# Altium PCB mach_mo_rong_v2.PcbDoc (part 3 of 3)
Units mm, origin at the board's own origin, x right, y up, seen from the top; angles counter-clockwise.
Board outline 108.98 x 90.43 mm, 2 copper layers (Top Layer, Bottom Layer); 128 components, 101 nets, 811 pads, 96 vias.
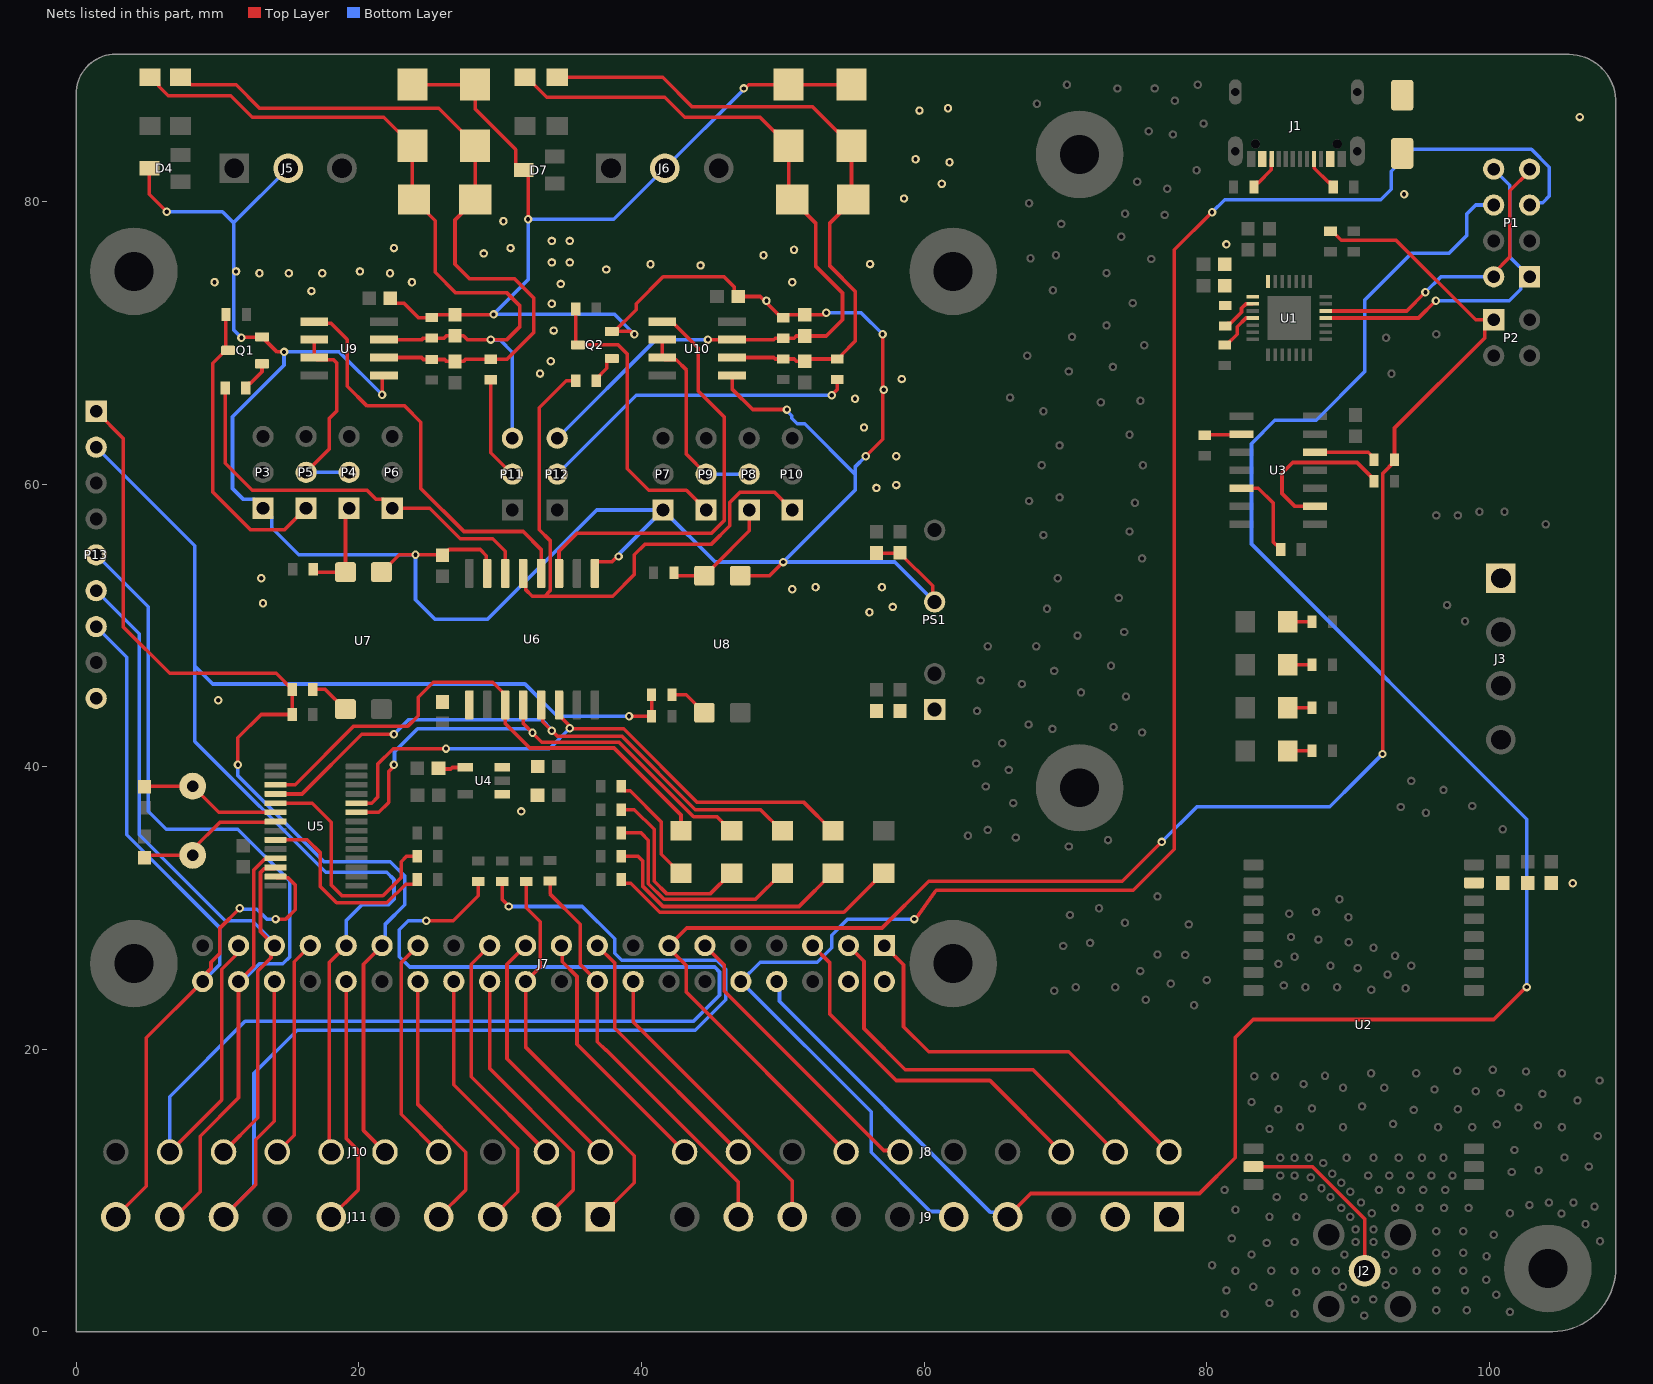
[diagram p2: the nets of this part, all layers, seen from the top]

## Via types
v1: diameter 0.6, hole 0.3, Top Layer to Bottom Layer, tented both sides, 95 vias
v2: diameter 0.6, hole 0.3, Top Layer to Bottom Layer, 1 vias

## Nets (pads, with @x,y where several pads share a name; then routed paths per layer and width w, separated by ;. In a path a pad name is that pad's centre, name@x,y a point inside that pad or via, vN(x,y) a via of type N, cw(c..) or ccw(c..) an arc to the next point about the centre after c; other vN are vias at no path point) (continued)
M_1: J7.13 J8.4 P2.1 R9.2 R12.2 | length 124.1
  Top Layer w0.254: J8.4@54.483,12.722 43.18,24.025 43.18,25.908 41.954,27.134 J7.13@41.954,27.327 43.202,28.575 57.023,28.575 60.325,31.877 74.041,31.877 v1(76.835,34.671) ; R9.2@88.773,77.904 88.898,77.904 89.532,77.27 93.418,77.27 99.06,71.628 P2.1@100.33,71.628 99.707,71.005 99.707,70.37 93.308,63.971 R12.2@93.308,61.722 93.308,61.597 92.464,60.753 92.464,40.902 v1(92.456,40.894)
  Bottom Layer w0.254: v1(76.835,34.671) 79.32,37.156 88.718,37.156 90.692,39.13 v1(92.456,40.894)
MISO: J7.35 J10.3 P13.6 U5.12 | length 54.4
  Top Layer w0.254: J10.3@10.414,12.722 12.827,15.135 12.827,25.527 13.776,26.476 13.776,27.089 J7.35@14.014,27.327 13.031,28.31 13.031,32.504 13.312,32.785 14.019,32.785 U5.12@14.097,32.863
  Bottom Layer w0.254: P13.6@1.397,52.451 4.445,49.403 4.445,35.179 10.541,29.083 12.446,29.083 14.014,27.515 J7.35@14.014,27.327
MOSI: J7.38 J11.9 P13.5 U5.11 | length 70.6
  Top Layer w0.254: J11.9@6.604,8.128 6.985,8.128 8.763,9.906 8.763,13.843 11.474,16.554 J7.38@11.474,24.787 12.562,25.875 12.562,32.685 13.312,33.435 14.019,33.435 U5.11@14.097,33.513
  Bottom Layer w0.254: P13.5@1.397,54.991 5.08,51.308 5.08,36.83 6.35,35.56 11.43,35.56 15.113,31.877 15.113,26.543 14.605,26.035 12.954,26.035 11.706,24.787 J7.38@11.474,24.787
NetAUX1_2: AUX1.2 R8.1 | length 1.7
  Top Layer w0.254: AUX1.2@85.745,41.117 R8.1@87.457,41.117
NetC12_2: C12.2 U4.4 | length 2
  Top Layer w0.254: C12.2@25.63,39.878 25.677,39.831 26.496,39.831 26.604,39.939 U4.4@27.529,39.939
NetC22_2: C22.2 D2.1 D3.1 F1.1 R35.1 R36.2 U9.6 | length 52.5
  Top Layer w0.254: F1.1@7.366,88.794 7.864,88.296 8.107,88.296 8.138,88.265 11.303,88.265 12.954,86.614 25.644,86.614 28.229,84.029 D2.1@28.229,83.949 28.229,80.143 D3.1@28.235,80.137 26.797,78.699 26.797,75.565 27.813,74.549 30.988,74.549 32.385,73.152 32.385,70.739 30.48,68.834 R35.1@29.337,68.834 27.545,68.834 27.394,68.683 C22.2@26.797,68.683 26.2,68.683 26.064,68.819 R36.2@25.146,68.819 24.569,68.819 24.427,68.961 U9.6@21.774,68.961
NetC24_1: C24.1 D3.2 D5.1 F2.1 P11.3 R38.1 U9.7 | length 56.9
  Top Layer w0.254: F2.1@5.207,88.794 5.332,88.794 5.83,88.296 5.83,88.171 6.502,87.499 10.926,87.499 12.446,85.979 21.754,85.979 D5.1@23.784,83.949 23.784,80.258 D3.2@23.905,80.137 25.4,78.642 25.4,74.986 26.853,73.533 30.48,73.533 31.369,72.644 31.369,71.12 30.48,70.231 v1(29.337,70.231) 27.66,70.231 27.394,70.497 C24.1@26.797,70.497 26.2,70.497 26.04,70.337 R38.1@25.146,70.337 24.569,70.337 24.463,70.231 U9.7@21.774,70.231
  Bottom Layer w0.254: v1(29.337,70.231) 29.383,70.185 30.018,70.185 30.861,69.342 P11.3@30.861,63.246
NetC26_2: C26.2 D6.1 D8.1 F3.1 R40.1 R41.2 U10.6 | length 47.7
  Top Layer w0.254: F3.1@34.036,88.794 41.508,88.794 43.603,86.699 52.114,86.699 53.851,84.962 53.931,84.962 54.864,84.029 D6.1@54.864,83.949 54.864,80.27 D8.1@54.997,80.137 53.34,78.48 53.34,75.438 55.118,73.66 55.118,70.104 54.171,69.157 54.171,69.053 53.973,68.855 R40.1@53.848,68.855 51.722,68.855 C26.2@51.562,68.695 50.965,68.695 50.805,68.855 R41.2@50.038,68.855 49.461,68.855 49.355,68.961 U10.6@46.412,68.961
NetC27_1: C27.1 D8.2 D9.1 F4.1 P12.3 R42.1 U10.7 | length 58.3
  Top Layer w0.254: F4.1@31.75,88.794 31.875,88.794 33.293,87.376 41.656,87.376 43.053,85.979 48.389,85.979 48.568,85.8 49.406,84.962 49.486,84.962 50.419,84.029 50.419,80.385 D8.2@50.667,80.137 52.324,78.48 52.324,75.438 54.229,73.533 54.229,71.628 53.086,70.485 C27.1@51.562,70.485 50.965,70.485 50.805,70.325 R42.1@50.038,70.325 49.461,70.325 49.367,70.231 U10.7@46.412,70.231 v1(44.704,70.231)
  Bottom Layer w0.254: P12.3@34.036,63.246 41.021,70.231 v1(44.704,70.231)
NetD1_A: D1.A J1.A4_B9 J1.B4_A9
NetJ1_A5: J1.A5 R1.2 | length 2.6
  Top Layer w0.254: J1.A5@87.61,83.007 87.633,82.984 87.633,82.367 88.651,81.349 88.776,81.349 88.974,81.151 R1.2@88.974,81.026
NetJ1_B5: J1.B5 R2.2 | length 2.6
  Top Layer w0.254: R2.2@83.365,81.026 83.365,81.151 83.563,81.349 83.688,81.349 84.587,82.248 84.587,82.984 J1.B5@84.61,83.007
NetJ2_1: J2.1 U2.12 | length 13.1
  Top Layer w0.254: U2.12@83.313,11.684 87.503,11.684 91.186,8.001 J2.1@91.186,4.318
NetJ7_1: J7.1 J8.10 | length 28.8
  Top Layer w0.254: J7.1@57.194,27.327 58.547,25.974 58.547,21.59 60.325,19.812 70.253,19.812 J8.10@77.343,12.722
NetJ7_3: J7.3 J8.9 | length 27.7
  Top Layer w0.254: J7.3@54.654,27.327 55.753,26.228 55.753,21.463 58.674,18.542 67.713,18.542 J8.9@73.533,12.722
NetJ7_5: J7.5 J8.8 | length 25.8
  Top Layer w0.254: J7.5@52.114,27.327 53.34,26.101 53.34,22.479 58.039,17.78 64.665,17.78 J8.8@69.723,12.722
NetJ7_11: J7.11 J8.5 | length 20.9
  Top Layer w0.254: J7.11@44.494,27.327 45.847,25.974 45.847,24.13 57.15,12.827 58.188,12.827 J8.5@58.293,12.722
NetJ7_16: J7.16 J9.8 | length 21.3
  Top Layer w0.254: J7.16@39.414,24.787 39.414,21.927 50.673,10.668 J9.8@50.673,8.128
NetJ7_17: J7.17 J8.2 | length 18.7
  Top Layer w0.254: J7.17@36.874,27.327 38.1,26.101 38.1,21.485 38.249,21.336 J8.2@46.863,12.722
NetJ7_19: J7.19 J8.1 | length 18.2
  Top Layer w0.254: J7.19@34.334,27.327 34.383,27.278 34.383,26.196 35.433,25.146 35.433,20.342 35.802,19.973 J8.1@43.053,12.722
NetJ7_21: J7.21 J10.10 | length 17.9
  Top Layer w0.254: J7.21@31.794,27.327 30.48,26.013 30.48,19.326 J10.10@37.084,12.722
NetJ7_23: J7.23 J10.9 | length 17.4
  Top Layer w0.254: J7.23@29.254,27.327 27.94,26.013 27.94,18.056 J10.9@33.274,12.722
NetJ7_24: J7.24 J11.2 | length 19.9
  Top Layer w0.254: J7.24@29.254,24.787 29.254,18.625 35.179,12.7 35.179,10.033 J11.2@33.274,8.128
NetJ7_26: J7.26 J11.3 | length 19.3
  Top Layer w0.254: J7.26@26.714,24.787 26.714,17.482 31.242,12.954 31.242,9.906 J11.3@29.464,8.128
NetJ7_27: J7.27 J10.7 | length 16.2
  Top Layer w0.254: J7.27@24.174,27.327 22.987,26.14 22.987,15.389 J10.7@25.654,12.722
NetJ7_28: J7.28 J11.4 | length 18.9
  Top Layer w0.254: J7.28@24.174,24.787 24.174,16.085 27.559,12.7 27.559,10.033 J11.4@25.654,8.128
NetJ7_32: J7.32 J11.6 | length 17.8
  Top Layer w0.254: J11.6@18.034,8.128 19.939,10.033 19.939,12.827 19.094,13.672 J7.32@19.094,24.787
NetJ7_33: J7.33 J10.4 | length 15.6
  Top Layer w0.254: J10.4@14.224,12.722 15.418,13.916 15.418,26.191 J7.33@16.554,27.327
NetL_PWR1_2: L_PWR1.2 R5.1 | length 1.7
  Top Layer w0.254: L_PWR1.2@85.745,50.261 R5.1@87.457,50.261
NetL_RXD1_2: L_RXD1.2 R7.1 | length 1.7
  Top Layer w0.254: L_RXD1.2@85.745,47.213 R7.1@87.457,47.213
NetL_TXD1_2: L_TXD1.2 R6.1 | length 1.7
  Top Layer w0.254: L_TXD1.2@85.745,44.165 R6.1@87.457,44.165
NetP11_2: P11.2 R35.2 | length 7.3
  Top Layer w0.254: R35.2@29.337,67.384 29.337,62.23 P11.2@30.861,60.706
NetP12_2: P12.2 R40.2 | length 23
  Top Layer w0.254: v1(53.467,66.294) 53.467,66.318 53.848,66.699 R40.2@53.848,67.405
  Bottom Layer w0.254: P12.2@34.036,60.706 39.624,66.294 v1(53.467,66.294)
NetQ1_1: Q1.1 R34.2 | length 2.3
  Top Layer w0.254: R34.2@11.991,66.802 11.991,66.927 12.189,67.125 12.314,67.125 13.138,67.949 Q1.1@13.138,68.519
NetQ2_1: Q2.1 R39.2 | length 2.1
  Top Layer w0.254: R39.2@36.793,67.31 36.793,67.435 37.552,68.194 37.552,68.702 37.75,68.9 Q2.1@37.903,68.9
NetR3_2: R3.2 U1.9 | length 2.8
  Top Layer w0.254: R3.2@81.315,71.194 81.513,71.392 81.695,71.392 82.473,72.17 82.473,72.44 82.788,72.755 U1.9@83.262,72.755
NetR4_1: R4.1 U1.11 | length 3.1
  Top Layer w0.254: R4.1@81.28,69.85 81.405,69.85 82.169,70.614 82.169,71.136 82.788,71.755 U1.11@83.262,71.755
NetR11_2: R11.2 U3.2 | length 2.6
  Top Layer w0.254: R11.2@79.875,63.471 R11.2@79.883,63.463 79.912,63.492 82.457,63.492 U3.2@82.486,63.522 U3.2@82.479,63.529
NetR12_1: R12.1 U3.12 | length 4.5
  Top Layer w0.254: U3.12@87.694,62.252 91.453,62.252 91.858,61.847 R12.1@91.858,61.722
NetR13_2: R13.2 U3.5 | length 6.3
  Top Layer w0.254: U3.5@82.486,59.712 83.671,59.712 84.709,58.674 84.709,55.917 84.931,55.695 85.056,55.695 85.254,55.497 R13.2@85.254,55.372
NetR14_1: R14.1 U3.9 | length 11.6
  Top Layer w0.254: U3.9@87.694,58.442 86.233,58.442 86.223,58.452 85.344,59.331 85.344,60.764 86.11,61.53 90.651,61.53 91.858,60.323 R14.1@91.858,60.198
NetR17_1: R17.1 RS_PWR1.2 | length 20.7
  Top Layer w0.254: R17.1@38.571,32.004 38.571,31.948 38.769,31.75 39.243,31.75 41.302,29.691 54.331,29.691 57.1,32.46 RS_PWR1.2@57.15,32.46
NetR18_1: R18.1 RS_TXD1.2 | length 8.2
  Top Layer w0.254: R18.1@38.571,38.608 38.571,38.483 38.769,38.285 39.203,38.285 41.402,36.086 41.402,33.807 42.749,32.46 RS_TXD1.2@42.799,32.46
NetR19_1: R19.1 RS_RXD1.2 | length 15.9
  Top Layer w0.254: R19.1@38.571,35.306 39.978,35.306 40.486,34.798 40.486,31.719 41.598,30.607 48.071,30.607 49.925,32.46 RS_RXD1.2@49.974,32.46
NetR20_1: R20.1 RS_TXD2.2 | length 13
  Top Layer w0.254: R20.1@38.571,36.957 39.497,36.957 40.894,35.56 40.894,31.888 41.767,31.015 44.892,31.015 46.337,32.46 RS_TXD2.2@46.387,32.46
NetR21_1: R21.1 RS_RXD2.2 | length 18.5
  Top Layer w0.254: R21.1@38.571,33.655 39.751,33.655 40.078,33.328 40.078,31.55 41.529,30.099 51.151,30.099 53.512,32.46 RS_RXD2.2@53.562,32.46
NetR26_1: R26.1 U7.1 | length 2.9
  Top Layer w0.254: R26.1@16.727,45.466 17.621,45.466 19.02,44.067 U7.1@19.05,44.067
NetR27_1: R27.1 U8.1 | length 2.8
  Top Layer w0.254: R27.1@42.164,45.085 43.178,45.085 43.872,44.391 43.872,44.387 44.447,43.813 U8.1@44.45,43.813
NetR28_2: R28.2 U5.9 | length 14
  Top Layer w0.254: U5.9@14.097,34.813 16.346,34.813 17.272,33.887 17.272,31.496 18.415,30.353 21.971,30.353 23.302,31.684 23.932,31.684 24.13,31.882 R28.2@24.13,32.004
NetR30_2: R30.2 U5.5 | length 17.2
  Top Layer w0.254: U5.5@14.097,37.413 16.689,37.413 18.034,36.068 18.034,31.623 18.796,30.861 21.697,30.861 22.987,32.151 22.987,33.274 23.368,33.655 R30.2@24.13,33.655
P24: J7.18 J9.9 R15.2 | length 29.3
  Top Layer w0.254: R15.2@33.528,31.914 33.528,30.988 35.665,28.851 35.665,25.996 J7.18@36.874,24.787 36.874,20.53 37.465,19.939 37.509,19.939 46.863,10.585 J9.9@46.863,8.128
P25: J7.22 J11.1 R16.2 | length 28.8
  Top Layer w0.254: R16.2@31.835,31.877 31.835,30.014 32.825,29.024 32.825,25.818 J7.22@31.794,24.787 31.794,20.149 39.497,12.446 39.497,10.541 J11.1@37.084,8.128
P26: J7.37 J10.2 R22.2 | length 96.7
  Top Layer w0.254: J10.2@6.604,12.722 10.287,16.405 10.287,25.654 11.236,26.603 11.236,27.089 J7.37@11.474,27.327 ; v1(24.765,29.083) 26.67,29.083 28.448,30.861 R22.2@28.448,31.877
  Bottom Layer w0.254: J10.2@6.604,12.722 6.604,16.637 11.938,21.971 43.688,21.971 45.525,23.808 45.525,25.468 45.175,25.818 23.585,25.818 22.86,26.543 22.86,28.448 23.495,29.083 v1(24.765,29.083)
P27: J7.36 J11.8 R23.2 | length 86.7
  Top Layer w0.254: J11.8@10.414,8.128 12.7,10.414 12.7,13.589 14.014,14.903 J7.36@14.014,24.787 ; R23.2@30.141,31.877 30.141,30.596 30.607,30.131 v1(30.607,30.099)
  Bottom Layer w0.254: J11.8@10.414,8.128 12.573,10.287 12.573,18.288 15.621,21.336 43.815,21.336 45.974,23.495 45.974,25.654 45.339,26.289 38.608,26.289 38.1,26.797 38.1,27.813 35.814,30.099 v1(30.607,30.099)
P_RX: J7.10 J9.5 P1.5 | length 135.8
  Top Layer w0.254: v1(59.309,29.21) 59.388,29.224 59.445,29.281 59.46,29.296 60.77,31.152 60.859,31.242 74.808,31.242 77.724,34.158 77.724,76.581 v1(80.391,79.248)
  Bottom Layer w0.254: v1(59.309,29.21) 54.61,29.21 53.467,28.067 53.467,27.178 52.451,26.162 48.409,26.162 J7.10@47.034,24.787 56.261,15.56 56.261,12.7 60.452,8.509 61.031,8.509 61.059,8.481 61.75,8.481 J9.5@62.103,8.128 ; v1(80.391,79.248) 81.28,80.137 92.329,80.137 93.064,80.872 93.064,82.142 94.615,83.693 102.997,83.693 104.267,82.423 104.267,80.391 103.797,79.921 103.035,79.921 P1.5@102.87,79.756
P_TX: J7.8 J9.4 P1.6 | length 146.7
  Top Layer w0.254: J9.4@65.913,8.128 67.564,9.779 79.502,9.779 82.042,12.319 82.042,20.828 83.312,22.098 100.33,22.098 v1@102.489,24.257
  Bottom Layer w0.254: J7.8@49.574,24.787 49.769,24.592 49.769,23.383 64.711,8.442 65.599,8.442 J9.4@65.913,8.128 ; P1.6@100.33,79.756 99.06,79.756 98.425,79.121 98.425,77.597 97.155,76.327 94.488,76.327 91.186,73.025 91.186,67.945 87.757,64.516 84.836,64.516 83.185,62.865 83.185,55.753 102.664,36.274 v1(102.664,24.396)
RPI_5V: C1.2 C2.2 C3.2 C6.1 C7.1 C9.2 C10.2 C13.2 C14.2 C15.1 D1.C J3.1 J7.2 J7.4 J9.1 J9.2 P13.9 PS1.1 R3.1 U1.7 U1.8 U2.25 U4.1 U4.3 U6.1 | length 0.3
  Top Layer w0.254: v1@105.769,31.598 105.918,31.747 v1(105.918,31.75) v1@105.918,31.877
  other v1: 31.496,36.83 10.033,44.704 81.407,76.962 93.98,80.518 106.426,85.979
RXD_1: RS_RXD1.1 U5.4 U6.5 | length 43.6
  Top Layer w0.254: U5.4@14.097,38.063 15.965,38.063 20.193,42.291 v1(22.479,42.291) ; U6.5@32.893,44.367 33.019,44.241 33.019,43.181 33.265,42.935 v1@33.715,42.485 ; v1(33.655,42.545) 34.063,42.137 38.635,42.137 43.815,36.957 48.428,36.957 49.925,35.46 RS_RXD1.1@49.974,35.46
  Bottom Layer w0.254: v1(22.479,42.291) 23.495,43.307 32.967,43.307 33.655,42.619 v1(33.655,42.545)
RXD_1B: U6.12 U9.1 | length 29.1
  Top Layer w0.254: U9.1@16.834,71.501 16.953,71.382 18.026,71.382 19.177,70.231 19.177,66.929 20.574,65.532 23.241,65.532 24.384,64.389 24.384,59.69 27.432,56.642 31.623,56.642 32.893,55.372 U6.12@32.893,53.677
RXD_2: RS_RXD2.1 U5.24 U6.6 | length 42.2
  Top Layer w0.254: U5.24@19.837,37.413 20.903,37.413 21.336,37.846 21.336,40.192 22.419,41.275 v1(26.162,41.275) ; U6.6@34.163,44.367 34.163,43.642 34.859,42.946 34.859,42.784 v1(34.925,42.718) ; v1@34.925,42.672 35.606,42.672 38.735,42.672 43.942,37.465 51.507,37.465 53.512,35.46 RS_RXD2.1@53.562,35.46
  Bottom Layer w0.254: v1(26.162,41.275) 33.482,41.275 v1(34.925,42.718)
RXD_2B: U6.11 U10.1 | length 30.5
  Top Layer w0.254: U6.11@34.163,53.677 34.163,55.245 35.433,56.515 44.958,56.515 45.847,57.404 45.847,64.77 44.025,66.592 44.025,69.638 42.162,71.501 U10.1@41.472,71.501
SCLK: J7.40 J11.10 P13.7 U5.13 | length 62.7
  Top Layer w0.254: J11.10@2.794,8.128 4.953,10.287 4.953,20.806 J7.40@8.934,24.787 8.934,25.124 9.525,25.715 9.525,26.162 10.16,26.797 10.16,28.575 v1(11.557,29.972) ; v1(14.097,29.21) 14.831,29.21 15.494,29.873 15.494,31.623 14.982,32.135 14.175,32.135 U5.13@14.097,32.213
  Bottom Layer w0.254: P13.7@1.397,49.911 3.556,47.752 3.556,35.179 10.16,28.575 10.16,26.013 J7.40@8.934,24.787 ; v1(11.557,29.972) 11.618,29.911 12.761,29.911 13.462,29.21 v1(14.097,29.21)
SGND: C17.2 C19.1 C20.1 C23.2 C24.2 C25.2 C27.2 D2.2 D4.3 D5.2 D6.2 D7.3 D9.2 J5.2 J6.2 P3.1 P7.1 pad.18@9.779,74.295 pad.18@11.302,75.057 pad.18@12.953,74.93 pad.18@13.08,53.34 pad.18@13.207,51.562 pad.18@15.038,74.928 pad.18@16.636,73.66 pad.18@17.398,74.93 pad.18@20.065,75.057 pad.18@22.2,74.925 pad.18@22.478,76.708 pad.18@23.748,74.295 pad.18@28.828,76.327 pad.18@30.225,78.613 pad.18@30.733,76.708 pad.18@32.817,67.823 pad.18@33.582,68.696 pad.18@33.654,72.771 pad.18@33.654,75.692 pad.18@33.654,77.216 pad.18@33.781,70.866 pad.18@34.289,74.168 pad.18@34.924,75.692 pad.18@34.924,77.216 pad.18@37.513,75.193 pad.18@40.639,75.565 pad.18@44.183,75.483 pad.18@48.64,76.2 pad.18@48.842,72.978 pad.18@50.671,52.562 pad.18@50.672,74.295 pad.18@50.799,76.581 pad.18@52.323,52.705 pad.18@55.117,66.04 pad.18@55.752,64.008 pad.18@56.133,50.927 pad.18@56.184,75.575 pad.18@56.628,59.73 pad.18@57.022,52.705 pad.18@57.149,66.675 pad.18@57.784,51.308 pad.18@58.038,61.976 pad.18@58.041,59.932 pad.18@58.42,67.437 pad.18@58.586,80.216 pad.18@59.405,83 pad.18@59.678,86.439 pad.18@61.261,81.253 pad.18@61.698,86.603 pad.18@61.807,82.782 PS1.4 Q1.2 Q2.2 R38.2 R42.2 U6.9 U6.15 U7.3 U8.3 U9.5 U10.5 | length 259.7
  Top Layer w0.254: D4.3@5.166,82.357 5.166,80.516 v1(6.395,79.287) ; v1(11.684,70.358) 11.715,70.389 13.107,70.389 Q1.2@13.138,70.419 14.203,69.354 v1(14.695,69.354) ; U7.3@21.59,53.767 21.62,53.767 22.844,54.991 v1(24.003,54.991) 25.884,54.991 C17.2@25.908,54.967 25.908,54.982 26.251,55.325 26.353,55.325 26.4,55.372 28.575,55.372 29.021,54.926 29.021,53.739 U6.15@29.083,53.677 ; v1(21.64,66.324) 21.64,67.557 U9.5@21.774,67.691 ; C23.2@22.225,73.152 22.568,72.809 23.192,72.809 24.214,71.787 R38.2@25.146,71.787 25.271,71.787 25.481,71.997 C24.2@26.797,71.997 29.513,71.997 v1(29.53,72.014) ; D5.2@23.784,88.279 D2.2@28.229,88.279 28.229,86.546 31.093,83.682 31.093,82.603 31.466,82.23 D7.3@31.666,82.23 31.971,81.925 v1(31.971,78.742) ; U6.9@36.703,53.677 36.703,54.327 36.876,54.5 37.913,54.5 38.288,54.875 v1(38.382,54.875) ; Q2.2@37.903,70.8 37.936,70.833 Q2.2@38.111,70.833 ; v1(39.497,70.612) 39.403,70.612 39.182,70.833 Q2.2@38.111,70.833 ; U10.5@46.412,67.691 46.412,66.731 47.865,65.278 v1(50.292,65.278) ; U8.3@46.99,53.513 49.068,53.513 v1(50.038,54.483) ; v1(47.236,88.007) 47.33,88.007 47.602,88.279 D9.2@50.419,88.279 D6.2@54.864,88.279 ; v1(53.086,72.136) 52.935,71.985 C27.2@51.562,71.985 50.373,71.985 50.163,71.775 R42.2@50.038,71.775 49.913,71.775 48.409,73.279 C25.2@46.851,73.279 46.555,73.575 46.555,73.968 45.847,74.676 41.529,74.676 39.624,72.771 39.624,72.346 Q2.2@38.111,70.833 ; v1(55.88,61.976) 57.069,63.165 v1(57.069,70.606) ; C20.1@56.642,55.118 58.281,55.118 C19.1@58.293,55.13 58.293,55.115 60.615,52.793 60.615,51.797 PS1.4@60.754,51.658
  Bottom Layer w0.254: v1(6.395,79.287) 10.335,79.287 11.125,78.496 ; v1(11.684,70.358) 11.125,70.917 11.125,78.496 ; J5.2@14.986,82.357 11.125,78.496 ; v1(21.64,66.324) 18.61,69.354 v1(14.695,69.354) 14.695,68.416 11.049,64.77 11.049,59.69 11.823,58.916 12.585,58.916 P3.1@13.208,58.293 13.831,57.67 13.831,56.908 15.748,54.991 v1(24.003,54.991) 24.003,51.816 25.4,50.419 29.083,50.419 36.83,58.166 P7.1@41.529,58.166 ; v1(38.382,54.875) 38.448,54.941 38.448,55.085 P7.1@41.529,58.166 ; v1(39.497,70.612) 38.095,72.014 v1(29.53,72.014) 31.971,74.455 v1(31.971,78.742) 38.041,78.742 J6.2@41.656,82.357 47.236,87.937 v1(47.236,88.007) ; v1(50.292,65.278) 50.292,65.184 50.631,64.845 50.631,64.669 51.023,64.277 51.547,64.277 55.118,60.706 ; v1(53.086,72.136) 55.539,72.136 v1(57.069,70.606) ; v1(55.88,61.976) 55.118,61.214 55.118,60.706 ; PS1.4@60.754,51.658 57.929,54.483 v1(50.038,54.483) ; P7.1@41.529,58.166 45.212,54.483 v1(50.038,54.483) ; v1(50.038,54.483) 55.118,59.563 55.118,60.706
TXD_1: RS_TXD1.1 U5.3 U6.3 | length 38.7
  Top Layer w0.254: U5.3@14.097,38.713 14.106,38.722 15.481,38.722 19.631,42.872 23.465,42.872 24.199,43.606 24.199,44.916 25.257,45.974 29.471,45.974 30.353,45.092 U6.3@30.353,44.367 30.353,43.053 32.085,41.321 38.054,41.321 42.799,36.576 RS_TXD1.1@42.799,35.46
TXD_1B: P6.1 R34.1 U6.14 | length 29.3
  Top Layer w0.254: R34.1@10.541,66.802 10.541,61.468 12.446,59.563 20.574,59.563 21.221,58.916 21.729,58.916 P6.1@22.352,58.293 25.019,58.293 27.178,56.134 29.464,56.134 30.353,55.245 U6.14@30.353,53.677
TXD_1B': P5.1 Q1.3 R33.1 | length 21.5
  Top Layer w0.254: R33.1@10.578,72.009 10.578,69.629 10.65,69.557 Q1.3@10.738,69.469 10.563,69.469 9.652,68.558 9.652,59.436 12.319,56.769 14.732,56.769 P5.1@16.256,58.293
TXD_2: RS_TXD2.1 U5.23 U6.4 | length 36.1
  Top Layer w0.254: U5.23@19.837,36.763 21.396,36.763 22.098,37.465 22.098,39.657 22.479,40.038 v1(22.479,40.132) ; U6.4@31.623,44.367 31.623,43.053 32.947,41.729 38.408,41.729 43.688,36.449 45.348,36.449 46.337,35.46 RS_TXD2.1@46.387,35.46
  Bottom Layer w0.254: v1(22.479,40.132) 22.516,40.169 22.516,41.058 24.149,42.691 31.963,42.691 32.263,42.391 v1(32.285,42.391)
TXD_2B: P10.1 R39.1 U6.13 | length 42.8
  Top Layer w0.254: U6.13@31.623,53.677 31.793,53.507 31.793,52.535 32.258,52.07 33.147,52.07 ; R39.1@35.343,67.31 34.671,67.31 32.766,65.405 32.766,56.769 33.528,56.007 33.528,52.451 33.147,52.07 ; P10.1@50.673,58.166 49.403,59.436 46.99,59.436 46.255,58.701 46.255,57.05 44.958,55.753 40.259,55.753 39.497,54.991 39.497,53.594 37.973,52.07 33.147,52.07
TXD_2B': P9.1 Q2.3 R37.1 | length 21.3
  Top Layer w0.254: R37.1@35.343,72.39 35.343,70.01 Q2.3@35.503,69.85 38.354,69.85 38.989,69.215 38.989,61.087 40.513,59.563 43.18,59.563 P9.1@44.577,58.166
TXDEN_1: J7.29 J10.6 P13.1 R24.2 R26.2 | length 75
  Top Layer w0.254: P13.1@1.397,65.151 3.302,63.246 3.302,49.911 6.604,46.609 14.134,46.609 R26.2@15.277,45.466 R24.2@15.277,43.688 13.081,43.688 11.43,42.037 v1(11.43,40.132) ; J7.29@21.634,27.327 20.32,26.013 20.32,14.246 J10.6@21.844,12.722
  Bottom Layer w0.254: v1(11.43,40.132) 11.43,39.37 17.526,33.274 22.225,33.274 23.241,32.258 23.241,30.226 21.872,28.857 21.872,27.565 J7.29@21.634,27.327
TXDEN_1': P4.1 R31.2 U7.4 | length 7
  Top Layer w0.254: R31.2@16.764,53.975 16.764,53.965 16.962,53.767 U7.4@19.05,53.767 19.05,58.039 P4.1@19.304,58.293
TXDEN_1'': P4.2 P5.2 U9.2 U9.3 | length 14.7
  Top Layer w0.254: P5.2@16.256,60.833 17.907,62.484 17.907,64.643 18.415,65.151 18.415,68.58 18.2,68.795 17,68.795 U9.3@16.834,68.961 U9.2@16.834,70.231
  Bottom Layer w0.254: P5.2@16.256,60.833 P4.2@19.304,60.833
TXDEN_2: J7.31 J10.5 P13.2 R25.2 R27.2 | length 99.5
  Top Layer w0.254: J10.5@18.034,12.722 17.907,12.849 17.907,26.14 J7.31@19.094,27.327 ; v1(39.121,43.569) 39.129,43.561 R25.2@40.714,43.561 R27.2@40.714,45.085
  Bottom Layer w0.254: P13.2@1.397,62.611 8.382,55.626 8.382,47.117 ; J7.31@19.094,27.327 19.094,29.105 20.215,30.226 22.098,30.226 22.479,30.607 22.479,32.004 21.971,32.512 17.653,32.512 8.382,41.783 8.382,47.117 ; v1(39.121,43.569) 34.028,43.569 31.75,45.847 9.652,45.847 8.382,47.117
TXDEN_2': P8.1 R32.2 U8.4 | length 8.2
  Top Layer w0.254: R32.2@42.291,53.721 42.291,53.711 42.489,53.513 44.453,53.513 45.058,54.118 45.058,54.121 47.625,56.688 P8.1@47.625,58.166
TXDEN_2'': P8.2 P9.2 U10.2 U10.3 | length 14.3
  Top Layer w0.254: U10.2@41.472,70.231 U10.3@41.472,68.961 41.64,68.793 42.459,68.793 43.18,68.072 43.18,62.103 P9.2@44.577,60.706
  Bottom Layer w0.254: P9.2@44.577,60.706 P8.2@47.625,60.706
U_RX: P1.1 P1.8 U1.25 | length 24.5
  Top Layer w0.254: U1.25@88.442,71.755 95.004,71.755 v1(96.236,72.987)
  Bottom Layer w0.254: v1(96.236,72.987) 101.435,72.987 102.247,73.799 102.247,74.053 P1.1@102.87,74.676 101.473,76.073 101.473,81.153 P1.8@100.33,82.296
U_TX: P1.2 P1.7 U1.26 | length 21.6
  Top Layer w0.254: U1.26@88.442,72.255 94.172,72.255 v1(95.493,73.575) ; P1.2@100.33,74.676 100.33,74.93 101.473,76.073 101.473,80.772 102.87,82.169 P1.7@102.87,82.296
  Bottom Layer w0.254: v1(95.493,73.575) 96.593,74.676 P1.2@100.33,74.676
XI: C18.2 U5.6 Y1.1 | length 10.1
  Top Layer w0.254: C18.2@4.826,38.584 4.858,38.616 Y1.1@8.232,38.616 10.085,36.763 U5.6@14.097,36.763
XO: C21.2 U5.7 Y1.2 | length 10.6
  Top Layer w0.254: C21.2@4.826,33.552 4.99,33.716 Y1.2@8.232,33.716 8.232,34.14 10.16,36.068 14.052,36.068 U5.7@14.097,36.113
pads on no net: J1. J1.A8 J1.B8 P3.3 P4.3 P5.3 P6.3 P7.3 P8.3 P9.3 P10.3 P11.1 P12.1 U1.1 U1.2 U1.10 U1.12 U1.13 U1.14 U1.15 U1.16 U1.17 U1.18 U1.19 U1.20 U1.21 U1.22 U1.23 U1.24 U1.27 U1.28 U2.1 U2.3 U2.4 U2.5 U2.6 U2.7 U5.1 U5.2 U5.16 U5.17 U5.18 U5.19 U5.20 U5.21 U5.25 U5.26 U5.27 U5.28 U6.7 U6.10

## Polygon pours and split planes (outlines as drawn)
GND on Top Layer "NONET_L-01_P-001" (solid, remove dead copper, pour order 2): 66.294,90.424 66.294,71.755 63.729,69.19 63.729,51.587 63.754,51.562 60.61,48.418 12.477,48.418 12.446,48.387 12.383,48.45 10.224,48.45 8.89,49.784 8.89,56.261 4.826,60.325 4.826,78.105 0,78.105 0,0 108.966,0 108.966,90.424
SGND on Top Layer "NONET_L-01_P-001" (solid, remove dead copper, pour order 1): 0,90.551 63.373,90.551 63.373,79.248 59.563,79.248 58.039,77.724 58.039,72.898 60.325,70.612 62.738,70.612 63.246,70.104 63.246,52.578 63.297,52.527 60.642,49.872 60.642,49.594 12.509,49.594 11.43,50.673 11.43,56.007 8.636,58.801 8.636,77.343 7.62,78.359 6.223,78.359 4.318,80.264 0,80.264
GND on Top Layer "NONET_L-01_P-001" (solid, remove dead copper, pour order 0): 66.294,90.424 66.294,71.755 63.754,69.215 63.754,51.562 60.579,48.387 60.516,48.45 10.224,48.45 8.89,49.784 8.89,56.261 4.826,60.325 4.826,78.105 0,78.105 0,0 108.966,0 108.966,90.424
SGND on Bottom Layer "NONET_L-01_P-001" (solid, remove dead copper, pour order 5): 63.373,90.424 63.373,79.248 59.563,79.248 58.039,77.724 58.039,72.898 60.325,70.612 62.738,70.612 63.246,70.104 63.246,52.578 63.271,52.553 60.579,49.86 60.579,49.657 12.446,49.657 11.43,50.673 11.43,56.007 8.636,58.801 8.636,77.343 7.62,78.359 6.223,78.359 4.318,80.264 0,80.264 0,90.424
GND on Bottom Layer "NONET_L-01_P-001" (solid, remove dead copper, pour order 4): 66.294,90.424 66.294,71.755 63.729,69.19 63.729,51.587 63.754,51.562 60.579,48.387 12.446,48.387 12.319,48.514 10.16,48.514 8.89,49.784 8.89,56.261 4.826,60.325 4.826,78.105 0,78.105 0,0 108.966,0 108.966,90.424

## Keep-outs
Keep-Out Layer:
  the board outline again, w0.254

## Other copper
Top Layer:
  region net 5VB: 49.403,67.818 49.403,66.802 52.387,66.802 52.451,66.739 52.451,67.818
  region net 5VB: 24.765,67.945 27.559,67.945 27.559,66.929 24.384,66.929 24.384,67.945
  region net 5VB: 26.162,67.945 26.162,65.278 27.559,65.278 27.559,67.945
  region net 5VB: 50.927,67.818 50.927,64.77 52.451,64.77 52.451,67.818
  region net 5VB: 11.557,73.025 11.557,71.374 13.843,71.374 13.843,73.025
  region net 5VB: 19.685,73.914 19.685,71.12 22.86,71.12 22.86,72.263 21.336,72.263 21.336,73.914
  region net 5VB: 36.322,71.882 38.481,71.882 38.481,73.533 36.322,73.533
  region net 5VB: 43.815,74.041 43.815,71.12 47.625,71.12 47.625,72.263 45.974,72.263 45.974,74.041
  region net 5VB: 40.005,54.483 40.005,50.546 41.529,50.546 41.402,50.673 41.402,54.483
  region net 5VB: 27.051,54.864 27.051,53.975 25.146,53.975 25.146,50.546 28.321,50.546 28.321,54.864
  region net 5VB: 14.478,54.737 14.478,51.435 15.367,50.546 53.467,50.546 55.499,52.578 55.499,55.88 57.023,55.88 57.023,57.785 53.721,57.785 53.721,52.705 52.578,51.562 16.129,51.562 15.748,51.943 15.748,54.737
  region net 5VB: 55.88,57.785 61.849,57.785 61.849,55.88 55.88,55.88
  region net RPI_5V: 0.508,45.847 0.508,43.434 11.049,43.434 11.049,45.847
  region net 3V3: 16.256,44.323 16.256,42.037 17.653,42.037 17.653,44.323
  region net 3V3: 15.367,36.957 15.367,35.814 15.113,35.56 15.24,35.433 16.256,35.433 16.256,36.957
  region net 3V3: 15.367,35.179 15.367,36.703 16.256,36.703 16.256,35.179
  region net 3V3: 41.783,44.196 41.656,44.069 41.656,42.164 42.672,42.164 42.672,44.196
  region net RPI_5V: 27.178,43.434 27.178,41.275 29.083,41.275 29.591,40.767 29.591,39.878 30.607,39.878 30.607,41.656 28.448,41.656 28.321,41.783 28.321,43.434
  region net RPI_5V: 25.273,43.942 25.4,43.815 26.924,43.815 26.924,43.307 27.051,43.18 28.321,43.18 28.321,45.593 25.273,45.593
  region net NetD1_A: 92.964,88.9 92.964,86.614 92.837,86.487 88.392,86.487 88.392,85.217 95.631,85.217 95.631,88.9
  region net NetD1_A: 84.201,83.566 84.328,83.693 84.328,86.233 88.392,86.233 88.392,83.693 88.519,83.566 88.646,83.566 88.646,86.36 84.074,86.36 84.074,83.693
  region net NetD1_A: 84.201,82.55 84.201,85.979 88.519,85.979 88.519,82.423 89.027,82.423 89.027,83.566 88.646,84.074 88.646,84.201 89.027,84.582 89.027,86.487 83.312,86.487 83.312,84.582 83.82,84.582 84.074,84.328 84.074,84.201 83.693,83.439 83.693,82.55
  region net 3.3V: 90.678,51.054 90.678,57.15 91.821,57.15 91.821,50.038 88.519,50.038 88.519,51.054
  region net RPI_5V: 96.139,82.931 96.139,87.376 107.569,87.376 107.569,84.455 98.679,84.455 98.679,82.931
  region net 3.3V: 92.964,64.389 92.964,66.675 85.217,66.675 85.217,64.389
  region net RPI_5V: 92.583,84.709 92.583,79.883 98.679,79.883 98.679,84.709
  region net 3.3V: 88.138,76.962 88.138,75.057 91.186,75.057 91.186,76.962
  region net RPI_5V: 83.947,75.438 84.455,74.93 84.455,74.422 81.661,74.422 81.661,75.438
  region net 3.3V: 82.296,77.216 82.296,75.692 83.947,75.692 84.709,74.93 84.709,73.914 84.963,73.914 84.963,75.438 85.217,75.692 85.217,77.216
  region net RPI_5V: 83.82,73.152 83.82,73.279 84.455,73.914 84.455,74.93 83.566,74.93 83.566,73.152
  region net RPI_5V: 80.772,77.47 80.772,72.136 82.042,72.136 82.042,72.771 82.423,73.152 83.82,73.152 83.82,74.93 82.042,74.93 82.042,77.47
  region net 3.3V: 88.519,51.054 88.519,40.005 89.408,40.005 89.408,51.054
  region net RPI_5V: 98.171,32.385 106.553,32.385 106.553,31.115 98.171,31.115
  region net 3V3: 25.146,34.925 37.655,34.925 37.655,34.163 25.146,34.163
  region net RPI_5V: 56.007,44.577 59.309,44.577 59.309,44.958 59.436,45.085 61.976,45.085 61.976,43.053 56.007,43.053
  region net 3V3: 36.449,40.767 36.449,31.242 37.719,31.242 37.719,40.767
  region net RPI_5V: 29.591,39.624 29.591,40.767 33.274,40.767 33.274,36.195 29.591,36.195 29.591,38.354 31.877,38.354 31.877,39.624
  region net 3V3: 26.035,33.147 25.146,33.147 25.146,37.211 25.019,37.338 25.019,38.735 28.067,38.735 28.067,37.465 26.035,37.465
  region net 3V3: 10.922,33.782 10.922,35.687 16.256,35.687 16.256,35.179 13.208,35.179 12.7,34.671 12.7,33.782
  text "VIETTIEN" at 49.15,44.958 h1.52
Bottom Layer:
  region net 5VB: 50.927,65.913 52.451,65.913 52.451,65.151 60.325,65.151 60.325,64.77 50.927,64.77
  region net 5VB: 59.436,68.326 46.609,68.326 45.593,69.342 45.593,72.39 43.815,72.39 43.688,72.517 43.688,73.279 47.498,73.279 47.498,69.85 61.849,69.85 61.849,57.785 61.849,55.88 59.436,55.88
  region net 5VB: 37.592,73.279 44.704,73.279 44.704,72.39 37.592,72.39
  region net 5VB: 26.416,51.054 27.559,51.054 27.559,66.294 26.416,66.294
  region net 5VB: 27.559,66.294 24.13,66.294 24.13,71.374 24.003,71.501 19.685,71.501 19.685,71.12 20.066,70.739 23.368,70.739 23.368,65.278 27.559,65.278
  region net 5VB: 20.828,71.12 20.828,72.263 13.843,72.263 13.843,72.39 12.827,72.39 12.827,71.501 19.685,71.501 19.685,71.12
  region net RPI_5V: 30.226,37.465 29.845,37.084 29.845,36.83 27.813,36.83 27.051,37.592 27.051,38.862 26.67,39.243 20.066,39.243 20.066,44.45 19.304,45.212 9.144,45.212 9.144,43.942 19.05,43.942 19.05,38.862 19.431,38.481 26.289,38.481 26.289,37.211 27.305,36.195 32.385,36.195 32.385,37.465
  region net RPI_5V: 30.48,37.465 30.48,34.671 61.849,34.671 61.849,35.941 33.528,35.941 33.02,36.449 33.02,37.465
  region net 3V3: 25.146,37.084 25.146,35.687 26.035,35.687 26.035,37.084
  region net 3V3: 15.367,35.941 26.035,35.941 26.035,36.576 16.51,36.576 16.383,36.703 16.383,42.037 17.653,42.037 17.653,43.18 15.367,43.18
  region net 3V3: 41.656,40.767 41.656,44.069 41.783,44.196 42.672,44.196 42.672,39.878 42.418,39.624 36.449,39.624 36.449,40.767
  region net 3.3V: 90.678,56.007 90.678,66.167 92.583,66.167 92.583,64.77 91.821,64.77 91.821,56.007
  region net RPI_5V: 105.283,54.229 105.283,87.376 107.569,87.376 107.569,54.229
  region net 3.3V: 84.328,76.073 84.328,65.405 86.614,65.405 86.614,66.675 85.344,66.675 85.217,66.802 85.217,76.073
  region net RPI_5V: 94.869,81.026 93.345,81.026 93.345,78.613 80.772,78.613 80.772,76.073 82.042,76.073 82.042,77.47 94.869,77.47
  region net RPI_5V: 59.563,30.353 65.786,30.353 66.167,29.972 66.167,19.05 62.992,19.05 60.706,16.764 61.976,15.494 64.008,17.526 67.691,17.526 67.691,30.48 66.421,31.75 62.484,31.75 61.849,32.385 61.849,45.212 59.563,45.212
  region net 3.3V: 84.328,75.057 84.328,76.073 85.217,76.073 85.217,75.438 89.281,75.438 89.281,76.073 90.043,76.073 90.043,75.057
  region net RPI_5V: 99.568,54.737 99.568,51.943 99.822,51.689 106.553,51.689 106.553,54.737
  region net RPI_5V: 78.994,9.779 80.264,9.779 80.264,17.272 82.804,19.812 107.569,19.812 107.569,54.737 105.41,54.737 105.41,22.225 104.648,21.463 82.169,21.463 78.994,18.288
  region net RPI_5V: 53.728,23.876 63.38,13.97 64.643,13.97 58.674,20.32 58.674,23.876
  region net RPI_5V: 63.373,14.224 63.373,12.192 64.643,12.192 64.643,13.97 64.389,14.224
  region net RPI_5V: 80.01,11.43 80.01,9.652 72.009,9.652 72.009,10.414 71.882,10.541 64.897,10.541 64.008,11.43
  region net RPI_5V: 63.373,12.065 64.516,10.922 65.913,10.922 64.389,12.446 63.373,12.446
  region net RPI_5V: 53.721,25.781 53.721,23.876 58.674,23.495 58.674,25.781
  region net RPI_5V: 72.009,10.16 72.009,5.969 80.264,5.969 80.264,10.16

## Silkscreen, mask and mechanical layers (free items; w line width, h text height)
Top Overlay:
  lines w0.254: 0.635,19.875 80.01,19.875 ; 3.175,43.561 6.477,43.561 6.477,52.959 8.636,55.118 8.636,55.499 8.636,56.007 ; 3.302,66.421 8.509,66.421 8.509,58.42 8.509,58.166 ; 5.08,17.272 5.08,22.479 ; 8.89,17.272 8.89,22.479 ; 11.938,56.642 11.938,55.753 12.446,55.753 ; 12.827,17.272 12.827,22.479 ; 16.637,17.272 16.637,22.479 ; 17.145,55.626 17.526,55.626 17.526,56.642 ; 18.034,56.642 18.034,55.626 18.669,55.626 ; 20.574,65.786 32.385,65.786 43.688,65.786 ; 20.701,17.272 20.701,22.479 ; 23.622,55.626 23.622,56.642 ; 24.384,17.272 24.384,22.479 ; 27.94,17.272 27.94,22.479 ; 31.623,17.272 31.623,22.479 ; 32.385,64.643 32.385,65.737 ; 35.687,17.272 35.687,22.479 ; 40.005,17.272 40.005,22.479 ; 40.259,56.515 40.259,55.753 40.894,55.753 ; 44.958,17.272 44.958,22.352 ; 45.593,55.753 45.847,55.753 45.847,56.515 ; 46.355,56.515 46.355,55.753 46.736,55.753 ; 48.768,17.272 48.768,22.352 ; 51.689,55.753 51.943,55.753 51.943,56.515 ; 52.832,17.272 52.832,22.479 ; 56.642,17.272 56.642,22.479 ; 60.198,17.272 60.198,22.479 ; 64.516,17.272 64.516,22.479 ; 68.326,17.272 68.326,22.479 ; 72.263,17.399 72.263,22.479 ; 76.2,17.272 76.2,22.479 ; 94.742,61.341 107.95,61.341 ; 94.742,64.135 107.95,64.135 ; 95.885,54.864 95.885,39.751 99.06,39.751 ; 97.409,58.674 97.409,66.929 ; 98.171,55.626 99.314,55.626 ; 0.635,17.272 80.01,17.272 80.01,22.479 0.635,22.479 0.635,17.272 ; 70.612,49.911 73.152,49.911 73.152,65.151 70.612,65.151 70.612,49.911 ; 94.742,58.674 107.95,58.674 107.95,66.929 94.742,66.929 94.742,58.674
  text "[" at 104.669,81.517 h1.52 r180
  text "[" at 98.425,80.916 h1.52
  text "A" at 97.431,80.899 h1.2
  text "A" at 105.178,80.899 h1.2
  text "[" at 104.669,78.977 h1.52 r180
  text "GND" at 13.736,78.7 h1.2
  text "GND" at 40.738,78.7 h1.2
  text "B-" at 10.568,78.687 h1.2
  text "A+" at 18.282,78.687 h1.2
  text "B-" at 37.492,78.687 h1.2
  text "A+" at 45.206,78.687 h1.2
  text "[" at 98.425,78.249 h1.52
  text "B" at 97.5,78.232 h1.2
  text "B" at 104.993,78.232 h1.2
  text "CHANNEL_1" at 10.07,76.363 h1.4
  text "CHANNEL_2" at 36.965,76.363 h1.4
  text "[" at 104.669,76.229 h1.52 r180
  text "C" at 97.45,75.578 h1.2
  text "C" at 104.943,75.578 h1.2
  text "[" at 98.425,75.523 h1.52
  text "M0" at 104.603,71.387 h1.2
  text "M1" at 97.31,71.374 h1.2
  text "GND" at 97.139,68.697 h0.8
  text "GND" at 104.505,68.697 h0.8
  text "USB ~ LoRa" at 99.078,65.041 h1.5
  text "A" at 95.69,65.024 h1.5
  text "CHANNEL_1" at 14.382,64.897 h1
  text "CHANNEL_2" at 44.069,64.897 h1
  text "TXDEN_2" at 3.155,64.869 h1.2
  text "OFF" at 52.328,63.167 h1.2
  text "OFF" at 9.518,63.132 h1.2
  text "OFF" at 23.88,63.132 h1.2
  text "ON" at 27.713,63.132 h1.2
  text "OFF" at 37.944,63.04 h1.2
  text "ON" at 35.587,63.005 h1.2
  text "B" at 95.776,62.357 h1.5
  text "Pi ~ LoRa" at 99.478,62.245 h1.5
  text "TXDEN_1" at 3.155,62.189 h1.2
  text "120R" at 26.67,60.211 h1.2
  text "120R" at 35.56,60.211 h1.2
  text "IRQ" at 3.156,59.509 h1.2
  text "C" at 95.588,59.453 h1.5
  text "USB ~ Pi" at 99.594,59.453 h1.5
  text "ON" at 23.881,57.96 h1.2
  text "ON" at 52.329,57.833 h1.2
  text "ON" at 10.187,57.798 h1.2
  text "ON" at 38.519,57.706 h1.2
  text "OFF" at 27.044,57.544 h1.2
  text "OFF" at 35.651,57.451 h1.2
  text "CS" at 3.158,57.163 h1.2
  text "RS485" at 5.514,56.388 h1.4
  text "Full-auto" at 12.834,55.638 h1.2
  text "Half-auto" at 18.967,55.638 h1.2
  text "Full-auto" at 41.238,55.633 h1.2
  text "Half-auto" at 47.105,55.62 h1.2
  text "LoRa" at 95.045,55.557 h1.2
  text "MOSI" at 3.156,54.509 h1.2
  text "5V" at 96.292,52.975 h1.4
  text "MISO" at 3.155,51.969 h1.2
  text "Raspberry PI HAT 2601" at 72.21,50.494 h1.52 r90
  text "SCLK" at 3.156,49.429 h1.2
  text "GND" at 96.209,49.08 h1.4
  text "GND" at 3.157,46.889 h1.2
  text "RX" at 96.281,45.339 h1.4
  text "5V" at 3.157,44.349 h1.2
  text "TX" at 96.286,41.333 h1.4
  text "IO6" at 17.554,21.099 h1.5
  text "GND" at 1.502,20.972 h1.5
  text "IO26" at 5.497,20.972 h1.5
  text "IO19" at 9.433,20.972 h1.5
  text "IO13" at 13.498,20.972 h1.5
  text "IO5" at 21.233,20.972 h1.5
  text "GND" at 28.426,20.972 h1.5
  text "IO10" at 41.439,20.972 h1.5
  text "3V3" at 45.729,20.972 h1.5
  text "IO22" at 49.571,20.972 h1.5
  text "IO0" at 25.144,20.95 h1.5
  text "IO11" at 32.61,20.95 h1.5
  text "IO9" at 36.699,20.95 h1.5
  text "IO27" at 53.345,20.95 h1.5
  text "IO17" at 57.028,20.95 h1.5
  text "GND" at 61.034,20.95 h1.5
  text "IO4" at 65.404,20.95 h1.5
  text "IO3" at 69.085,20.95 h1.5
  text "IO2" at 73.027,20.95 h1.5
  text "3V3" at 77.098,20.845 h1.5
  text "IO21" at 1.526,18.432 h1.5
  text "IO20" at 5.419,18.432 h1.5
  text "IO16" at 9.434,18.432 h1.5
  text "GND" at 13.313,18.432 h1.5
  text "IO12" at 17.44,18.432 h1.5
  text "GND" at 21.06,18.432 h1.5
  text "IO1" at 25.14,18.432 h1.5
  text "IO7" at 28.73,18.432 h1.5
  text "IO8" at 32.92,18.432 h1.5
  text "IO25" at 36.354,18.432 h1.5
  text "GND" at 41.38,18.432 h1.5
  text "IO24" at 45.631,18.432 h1.5
  text "IO23" at 49.693,18.432 h1.5
  text "GND" at 53.191,18.432 h1.5
  text "IO18" at 57.058,18.432 h1.5
  text "IO15" at 60.865,18.432 h1.5
  text "GND" at 68.685,18.432 h1.5
  text "IO14" at 65.062,18.305 h1.5
  text "5V" at 73.254,18.305 h1.5
  text "5V" at 77.445,18.305 h1.5
Bottom Overlay:
  text "[" at 104.013,81.39 h1.52 r180
  text "[" at 99.187,80.789 h1.52
  text "A" at 98.911,80.772 h1.2
  text "A" at 105.134,80.772 h1.2
  text "B-" at 11.53,80.01 h1.2
  text "GND" at 16.007,79.997 h1.2
  text "A+" at 19.437,80.01 h1.2
  text "B-" at 38.454,80.01 h1.2
  text "GND" at 43.01,79.997 h1.2
  text "A+" at 46.234,80.01 h1.2
  text "[" at 104.013,78.977 h1.52 r180
  text "B" at 105.065,78.359 h1.2
  text "[" at 99.187,78.249 h1.52
  text "B" at 98.842,78.232 h1.2
  text "[" at 104.013,76.31 h1.52 r180
  text "C" at 98.765,75.578 h1.2
  text "[" at 99.187,75.582 h1.52
  text "C" at 105.115,75.578 h1.2
  text "M0" at 105.328,71.387 h1.2
  text "M1" at 99.159,71.374 h1.2
  text "GND" at 99.181,68.843 h0.8
  text "GND" at 105.531,68.843 h0.8
  text "TXDEN_2" at 7.523,64.869 h1.2
  text "TXDEN_1" at 7.383,62.189 h1.2
  text "IRQ" at 4.545,59.509 h1.2
  text "CS" at 4.157,57.163 h1.2
  text "MOSI" at 5.342,54.509 h1.2
  text "5V" at 99.207,52.926 h1.4
  text "MISO" at 5.39,51.969 h1.2
  text "SCLK" at 5.528,49.429 h1.2
  text "GND" at 99.207,49.031 h1.4
  text "GND" at 5.047,46.889 h1.2
  text "RX" at 99.207,45.29 h1.4
  text "5V" at 4.035,44.349 h1.2
  text "TX" at 99.207,41.284 h1.4
  text "GND" at 9.508,31.564 h1.5 r90
  text "GND" at 27.288,31.564 h1.5 r90
  text "IO26" at 11.921,31.449 h1.5 r90
  text "IO19" at 14.588,31.45 h1.5 r90
  text "IO13" at 17.255,31.449 h1.5 r90
  text "IO10" at 34.781,31.446 h1.5 r90
  text "IO22" at 39.861,31.439 h1.5 r90
  text "IO27" at 42.401,31.449 h1.5 r90
  text "IO17" at 45.195,31.449 h1.5 r90
  text "IO11" at 29.828,31.263 h1.5 r90
  text "3V3" at 37.448,30.995 h1.5 r90
  text "3V3" at 57.514,30.995 h1.5 r90
  text "IO6" at 19.668,30.703 h1.5 r90
  text "IO5" at 22.081,30.71 h1.5 r90
  text "IO0" at 24.875,30.7 h1.5 r90
  text "IO9" at 32.368,30.704 h1.5 r90
  text "IO4" at 50.148,30.698 h1.5 r90
  text "IO3" at 52.561,30.703 h1.5 r90
  text "IO2" at 54.974,30.693 h1.5 r90
  text "GND" at 46.499,28.726 h1.5 r270
  text "IO21" at 9.381,23.266 h1.5 r90
  text "IO20" at 11.921,23.266 h1.5 r90
  text "IO16" at 14.461,23.266 h1.5 r90
  text "GND" at 17.001,23.266 h1.5 r90
  text "IO12" at 19.541,23.266 h1.5 r90
  text "GND" at 22.081,23.266 h1.5 r90
  text "IO1" at 24.494,23.266 h1.5 r90
  text "IO7" at 27.034,23.266 h1.5 r90
  text "IO8" at 29.701,23.266 h1.5 r90
  text "IO25" at 32.241,23.266 h1.5 r90
  text "GND" at 34.908,23.266 h1.5 r90
  text "IO24" at 37.321,23.266 h1.5 r90
  text "IO23" at 39.861,23.266 h1.5 r90
  text "GND" at 42.528,23.266 h1.5 r90
  text "IO18" at 44.941,23.266 h1.5 r90
  text "IO15" at 47.481,23.266 h1.5 r90
  text "IO14" at 50.021,23.266 h1.5 r90
  text "GND" at 52.561,23.266 h1.5 r90
  text "5V" at 54.974,23.266 h1.5 r90
  text "5V" at 57.641,23.266 h1.5 r90
  text "GND" at 4.351,14.514 h1.5
  text "IO26" at 8.231,14.514 h1.5
  text "3V3" at 48.009,14.527 h1.5
  text "IO19" at 12.03,14.495 h1.5
  text "IO13" at 15.966,14.495 h1.5
  text "IO6" at 19.149,14.495 h1.5
  text "IO5" at 22.836,14.495 h1.5
  text "IO0" at 26.641,14.495 h1.5
  text "GND" at 31.01,14.495 h1.5
  text "IO11" at 34.796,14.495 h1.5
  text "IO9" at 38.2,14.495 h1.5
  text "IO10" at 44.413,14.495 h1.5
  text "IO22" at 52.029,14.495 h1.5
  text "IO27" at 55.971,14.495 h1.5
  text "IO17" at 59.654,14.495 h1.5
  text "GND" at 63.522,14.495 h1.5
  text "IO4" at 66.899,14.495 h1.5
  text "IO3" at 70.711,14.495 h1.5
  text "IO2" at 74.516,14.495 h1.5
  text "3V3" at 78.604,14.495 h1.5
  text "IO21" at 4.189,5.224 h1.5
  text "IO20" at 8.266,5.224 h1.5
  text "IO16" at 11.902,5.224 h1.5
  text "GND" at 15.897,5.224 h1.5
  text "IO12" at 19.644,5.224 h1.5
  text "GND" at 23.644,5.224 h1.5
  text "IO1" at 26.803,5.224 h1.5
  text "IO7" at 30.325,5.224 h1.5
  text "IO8" at 34.263,5.224 h1.5
  text "IO25" at 38.576,5.224 h1.5
  text "GND" at 44.599,5.224 h1.5
  text "IO24" at 48.349,5.224 h1.5
  text "IO23" at 52.161,5.224 h1.5
  text "GND" at 56.156,5.224 h1.5
  text "IO18" at 59.655,5.224 h1.5
  text "IO15" at 63.722,5.224 h1.5
  text "IO14" at 67.526,5.224 h1.5
  text "GND" at 71.396,5.224 h1.5
  text "5V" at 74.32,5.24 h1.5
  text "5V" at 78.384,5.24 h1.5
Mechanical 1:
  pour cut-out: 12.446,48.387 cw(c13.081,49.022) 12.446,49.657 60.579,49.657 cw(c59.944,49.022) 60.579,48.387
  pour cut-out: 12.446,48.387 60.579,48.387 ccw(c59.944,49.022) 60.579,49.657 12.446,49.657 ccw(c13.081,49.022)
  pour cut-out: 12.446,48.387 cw(c13.081,49.022) 12.446,49.657 60.579,49.657 cw(c59.944,49.022) 60.579,48.387
  pour cut-out: 12.446,48.387 cw(c13.081,49.022) 12.446,49.657 60.579,49.657 cw(c59.944,49.022) 60.579,48.387
  pour cut-out: 12.446,48.387 cw(c13.081,49.022) 12.446,49.657 60.579,49.657 cw(c59.944,49.022) 60.579,48.387
  lines w0.254: 12.446,48.387 cw(c13.081,49.022) 12.446,49.657 60.579,49.657 cw(c59.944,49.022) 60.579,48.387 12.446,48.387 ; 63.246,52.578 ccw(c63.5,52.832) 63.754,52.578 63.754,52.959 63.754,69.215 ccw(c63.5,68.961) 63.246,69.215 63.246,52.578

## Text inside footprints (layer, text, board x,y; h text height)
U3: Mechanical 13 "*" at 83.16,64.005 h1.27